# Altium PCB Testboard.PcbDoc (part 1 of 2)
Units mil, origin at the board's own origin, x right, y up, seen from the top; angles counter-clockwise.
Board outline 5500 x 5000 mil, 4 copper layers (Top layer, Inner Layer 1, Inner Layer 2, Bottom Layer), stack 13.956 mil thick; 71 components, 75 nets, 1162 pads, 400 vias.
Unrouted connection lines stored in the file: 423.
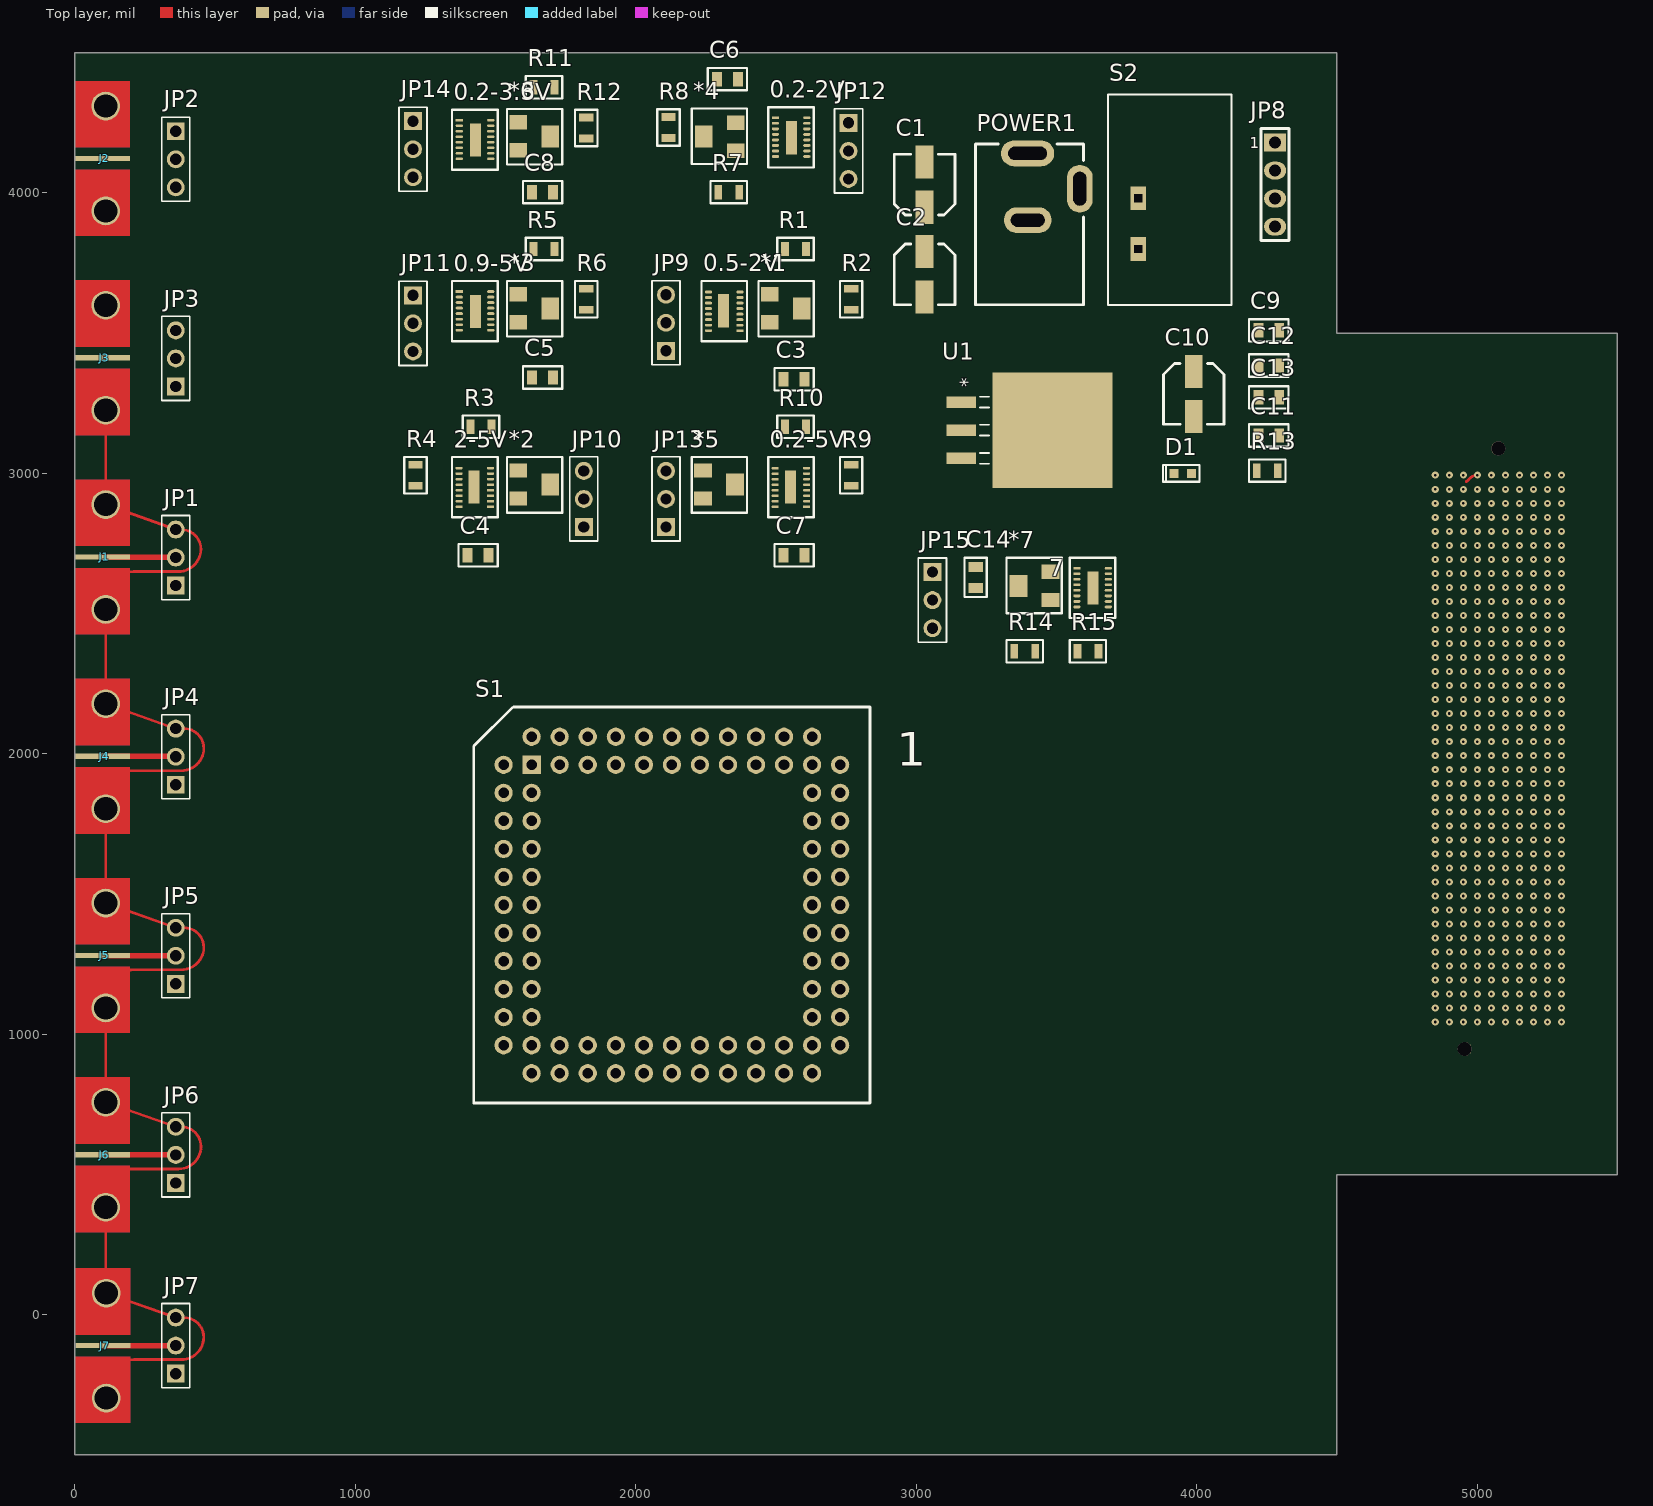
[diagram p0: Top layer view]
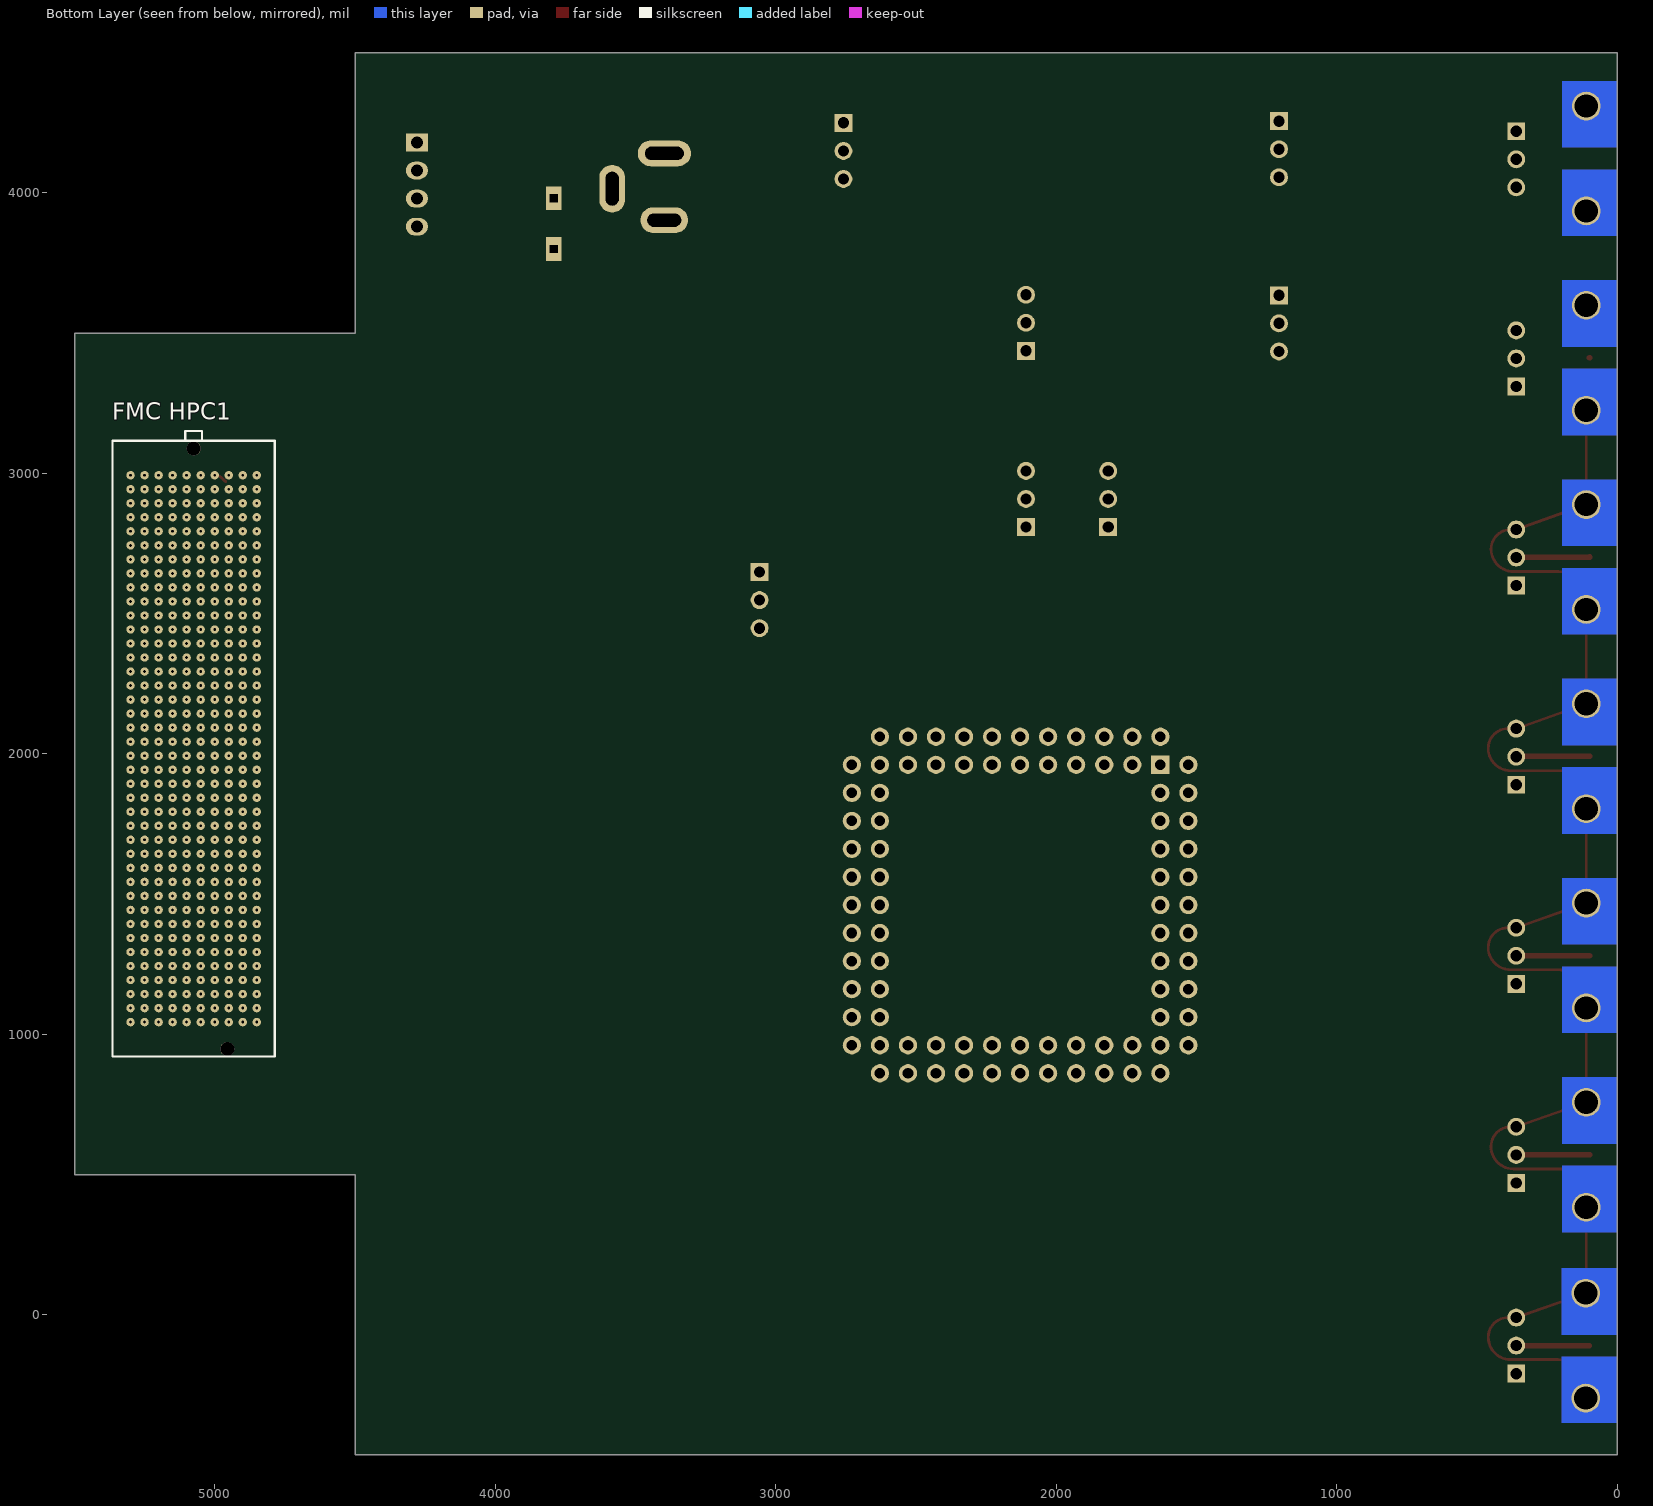
[diagram p1: Bottom Layer view, seen from below]

## Layer stack, top to bottom
Top Solder: solder mask 0.4, Solder Resist, Dk 3.5
Top layer: signal copper 1.378
Dielectric 2: prepreg 2.8, PP-006, Dk 4.1
Inner Layer 1: signal copper 1.4
Dielectric 1: dielectric 2.8, FR-4, Dk 4.8
Inner Layer 2: signal copper 1.4
Dielectric 3: prepreg 2.8, PP-006, Dk 4.1
Bottom Layer: signal copper 1.378
Bottom Solder: solder mask 0.4, Solder Resist, Dk 3.5

## Board outline
0,-500 4500,-500 4500,500 5500,500 5500,3500 4500,3500 4500,4500 0,4500 0,200 0,100

## Design rules (kind name [scope] priority, off if disabled: settings)
BoardOutlineClearance [All] p1: gap=10 ignorepadtopadclearanceinfootprint=FALSE
Clearance [All] p1: gap=6 ignorepadtopadclearanceinfootprint=TRUE
ComponentClearance [All] p1: gap=4 collisioncheckmode=3 verticalgap=4 showdistances=FALSE
HoleSize [All] p1: absolutevalues=TRUE maxlimit=250 minlimit=4 maxpercent=80.000 minpercent=20.000
HoleToHoleClearance [All] p1: gap=11 allowstackedmicrovias=TRUE
MatchedLengths [InNetClass('TIA')] p1: tolerance=10 checknetsindiffpair=FALSE checkdiffpairvsdiffpair=TRUE checkxsignals=TRUE checkothers=TRUE
MinimumAnnularRing [All] p1: minimumring=4
PlaneClearance [All] p1: clearance=10
PolygonConnect [All] p1: connectstyle=Relief reliefconductorwidth=10 reliefentries=4 polygonreliefangle="90 Angle" airgapwidth=10
RoutingVias [All] p1: holewidth=16 width=32 viastyle="Through Hole" minholewidth=4 minwidth=12 maxholewidth=16 maxwidth=32
SolderMaskExpansion [All] p1: expansion=3 istentingtop=FALSE
Width [All] p1: maxlimit=100 minlimit=3 preferedwidth=7
26 further rules are at their usual default settings.

## Classes and differential pairs
net class DAC: DAC_CLK_AZ_IN1 DAC_CLK_DAC_IN1 DAC_CLK_IN1 DAC_DATAIN_IN1 DAC_RST_IN1 DAC_SYNC_IN1 DAC_TBUFFER_IN1 DAC_TDAC_IN1
net class ADC: ADC_CLK ADC_CLK_SAMPLE ADC_DOUT1 ADC_DOUT2 ADC_DOUT3 ADC_DOUT4 ADC_DOUT5 ADC_DOUT6 ADC_DOUT7 ADC_DOUT8 ADC_DOUT9 ADC_DOUT10
component class VOUT_0.2V-3.3V: 7 *7 C14 JP15 R14 R15
net class TIA: TIA_CIN0 TIA_CIN1 TIA_CIN2 TIA_CIN3 TIA_CIN5 TIA_CIN6
component class 12V_to_5V: C9 C10 C11 C12 C13 D1 R13 U1

## Components (designator, comment, footprint, x,y, rotation, side; value= is the part's Value field where it differs from the comment)
0.2-2V "Part Number: LT3022EDHC#PBF-ND" LT3022 2497.99,4267.87 r0 top
0.2-3.3V "Part Number: LT3022EDHC#PBF-ND" LT3022 1370.95,4259.53 r0 top
0.2-5V "Part Number: LT3022EDHC#PBF-ND" LT3022 2609.29,2880.97 r180 top
0.5-2V "Part Number: LT3022EDHC#PBF-ND" LT3022 2371.53,3509 r180 top
0.9-5V "Part Number: LT3022EDHC#PBF-ND" LT3022 1370.95,3648.53 r0 top
2-5V "Part Number: LT3022EDHC#PBF-ND" LT3022 1482.25,2880.97 r180 top
7 "Part Number: LT3022EDHC#PBF-ND" LT3022 3573,2661.74 r0 top
*1 "Var_RES" res_var_5turn 2477.76,3638.41 r270 top
*2 "Var_RES" res_var_5turn 1581,3010.38 r270 top
*3 "Var_RES" res_var_5turn 1581,3638.41 r270 top
*4 "Var_RES" res_var_5turn 2356.93,4151 r90 top
*5 "Var_RES" res_var_5turn 2240,3010.38 r270 top
*6 "Var_RES" res_var_5turn 1581,4252 r270 top
*7 "Var_RES" res_var_5turn 3479.17,2548.87 r90 top
C1 "100u /10V" C_ALU_C_SIZE 3030,4029.71 r90 top
C2 "100u /10V" C_ALU_C_SIZE 3030,3710 r270 top
C3 "10uF" C0805 2527.44,3336 r0 top
C4 "10uF" C0805 1400.4,2708 r0 top
C5 "10uF" C0805 1705.49,3342 r180 top
C6 "10uF" C0805 2289.68,4406 r0 top
C7 "10uF" C0805 2527.44,2708 r0 top
C8 "10uF" C0805 1705.49,4003 r180 top
C9 "10uF RF" C0805 4220,3510 r0 top
C10 "100u /10V" C_ALU_C_SIZE 3990,3283.24 r270 top
C11 "10nF RF" C0805 4220,3135 r0 top
C12 "100nF RF" C0805 4220,3385 r0 top
C13 "10uF RF" C0805 4220,3271 r0 top
C14 "10uF" C0805 3212,2591.86 r90 top
D1 "Green" LED_0603 3919.17,3000 r0 top
"FMC HPC1" "FMC_HPC" FMC_HPC 4955.92,947.98 r90 bottom
J1 "SMA-32K243-40ML5" ROS-32K243-40ML5_V -0.24,2701.99 r90 top
J2 "SMA-32K243-40ML5" ROS-32K243-40ML5_V -0.24,4122.99 r90 top
J3 "SMA-32K243-40ML5" ROS-32K243-40ML5_V -0.24,3412.49 r90 top
J4 "SMA-32K243-40ML5" ROS-32K243-40ML5_V -0.24,1991.5 r90 top
J5 "SMA-32K243-40ML5" ROS-32K243-40ML5_V -0.24,1281 r90 top
J6 "SMA-32K243-40ML5" ROS-32K243-40ML5_V -0.24,570.5 r90 top
J7 "SMA-32K243-40ML5" ROS-32K243-40ML5_V 1.57,-110 r90 top
JP1 "Jumper" 01x03_0.1in_th_straight_b_nom 360,2700 r90 top
JP2 "Jumper" 01x03_0.1in_th_straight_b_nom 360,4120 r270 top
JP3 "Jumper" 01x03_0.1in_th_straight_b_nom 360,3410 r90 top
JP4 "Jumper" 01x03_0.1in_th_straight_b_nom 360,1990 r90 top
JP5 "Jumper" 01x03_0.1in_th_straight_b_nom 360,1280 r90 top
JP6 "Jumper" 01x03_0.1in_th_straight_b_nom 360,570 r90 top
JP7 "Jumper" 01x03_0.1in_th_straight_b_nom 360,-110 r90 top
JP8 "HDR 1x4" Hdr_1x4_2.54mm 4280,4180 r0 top
JP9 "Jumper" 01x03_0.1in_th_straight_b_nom 2108,3537.04 r90 top
JP10 "Jumper" 01x03_0.1in_th_straight_b_nom 1814.98,2909 r90 top
JP11 "Jumper" 01x03_0.1in_th_straight_b_nom 1206,3535 r270 top
JP12 "Jumper" 01x03_0.1in_th_straight_b_nom 2759,4150 r270 top
JP13 "Jumper" 01x03_0.1in_th_straight_b_nom 2108,2909 r90 top
JP14 "Jumper" 01x03_0.1in_th_straight_b_nom 1206,4156 r270 top
JP15 "Jumper" 01x03_0.1in_th_straight_b_nom 3058,2548.21 r270 top
POWER1 "PWR-2.1MM" POWER2.1MM 3397.45,4141.24 r270 top
R1 "100" R0805 2607.24,3800 r180 top
R2 "100" R0805 2768.02,3583.65 r90 top
R3 "100" R0805 1411,3166 r0 top
R4 "100" R0805 1215.02,2955.61 r90 top
R5 "100" R0805 1710.49,3800 r180 top
R6 "100" R0805 1824,3583.65 r90 top
R7 "100" R0805 2294.68,4003 r0 top
R8 "100" R0805 2117.02,4271 r270 top
R9 "100" R0805 2768.02,3030.42 r270 top
R10 "100" R0805 2532.44,3166 r0 top
R11 "100" R0805 1710.49,4377 r180 top
R12 "100" R0805 1824,4194.2 r90 top
R13 "2k" R0805 4289.8,3010 r180 top
R14 "100" R0805 3349.69,2366 r0 top
R15 "100" R0805 3649.85,2366 r180 top
S1 "CONN SOCKET PLCC 20POS TIN" SERIES940_Socket 1629,1961 r0 top
S2 "SW-SPST" SPST-2 3792,3981.17 r270 top
U1 "Part Number: LM1085IS-5.0/NOPB" LM1085 3487,3154 r270 top value=Value

## Footprints (in the part's own frame and the unit in brackets; to place one, negate y for a bottom-side part, rotate by r counter-clockwise, add the part's x,y. Pads: shape width x height; smd on the part's side, far side on the other; paste and mask are expansions set on the pad)
01x03_0.1in_th_straight_b_nom [mm] "3 positions (1 row, 3 columns), 0.1 Inch pitch, through hole straight header (B Density)"
  rect 1.62x1.62 hole 1.02: 1(-2.54,0)
  round 1.62 hole 1.02: 2(0,0) 3(2.54,0)
  silkscreen extent -3.81,-1.27 3.81,1.27, body extent -3.94,-1.27 3.81,1.27, height 8.38
C0805 [mm]
  rect 0.9x1.3 smd: 1(0,0) 2(1.9,0)
  silkscreen extent -0.83,-1.02 2.73,1.02, body extent -0.05,-0.6 1.95,0.6, height 1.46
C_ALU_C_SIZE [mm]
  rect 3x1.6 smd: 1(-2.05,0) 2(2.05,0)
  silkscreen extent -2.75,-2.75 2.75,2.75, body extent -2.95,-2.65 2.95,2.65, height 5.41
FMC_HPC [mm]
  round 0.762 smd paste-25.4 mask+0.013: A1(51.956,8.765) A2(50.686,8.765) A3(49.416,8.765) A4(48.146,8.765) A5(46.876,8.765) A6(45.606,8.765) A7(44.336,8.765) A8(43.066,8.765) A9(41.796,8.765) A10(40.526,8.765) A11(39.256,8.765) A12(37.986,8.765) A13(36.716,8.765) A14(35.446,8.765) A15(34.176,8.765) A16(32.906,8.765) A17(31.636,8.765) A18(30.366,8.765) A19(29.096,8.765) A20(27.826,8.765) A21(26.556,8.765) A22(25.286,8.765) A23(24.016,8.765) A24(22.746,8.765) A25(21.476,8.765) A26(20.206,8.765) A27(18.936,8.765) A28(17.666,8.765) A29(16.396,8.765) A30(15.126,8.765) A31(13.856,8.765) A32(12.586,8.765) A33(11.316,8.765) A34(10.046,8.765) A35(8.776,8.765) A36(7.506,8.765) A37(6.236,8.765) A38(4.966,8.765) A39(3.696,8.765) A40(2.426,8.765) B1(51.956,7.495) B2(50.686,7.495) B3(49.416,7.495) B4(48.146,7.495) B5(46.876,7.495) B6(45.606,7.495) B7(44.336,7.495) B8(43.066,7.495) B9(41.796,7.495) B10(40.526,7.495) B11(39.256,7.495) B12(37.986,7.495) B13(36.716,7.495) B14(35.446,7.495) B15(34.176,7.495) B16(32.906,7.495) B17(31.636,7.495) B18(30.366,7.495) B19(29.096,7.495) B20(27.826,7.495) B21(26.556,7.495) B22(25.286,7.495) B23(24.016,7.495) B24(22.746,7.495) B25(21.476,7.495) B26(20.206,7.495) B27(18.936,7.495) B28(17.666,7.495) B29(16.396,7.495) B30(15.126,7.495) B31(13.856,7.495) B32(12.586,7.495) B33(11.316,7.495) B34(10.046,7.495) B35(8.776,7.495) B36(7.506,7.495) B37(6.236,7.495) B38(4.966,7.495) B39(3.696,7.495) B40(2.426,7.495) C1(51.956,6.225) C2(50.686,6.225) C3(49.416,6.225) C4(48.146,6.225) C5(46.876,6.225) C6(45.606,6.225) C7(44.336,6.225) C8(43.066,6.225) C9(41.796,6.225) C10(40.526,6.225) C11(39.256,6.225) C12(37.986,6.225) C13(36.716,6.225) C14(35.446,6.225) C15(34.176,6.225) C16(32.906,6.225) C17(31.636,6.225) C18(30.366,6.225) C19(29.096,6.225) C20(27.826,6.225) C21(26.556,6.225) C22(25.286,6.225) C23(24.016,6.225) C24(22.746,6.225) C25(21.476,6.225) C26(20.206,6.225) C27(18.936,6.225) C28(17.666,6.225) C29(16.396,6.225) C30(15.126,6.225) C31(13.856,6.225) C32(12.586,6.225) C33(11.316,6.225) C34(10.046,6.225) C35(8.776,6.225) C36(7.506,6.225) C37(6.236,6.225) C38(4.966,6.225) C39(3.696,6.225) C40(2.426,6.225) D1(51.956,4.955) D2(50.686,4.955) D3(49.416,4.955) D4(48.146,4.955) D5(46.876,4.955) D6(45.606,4.955) D7(44.336,4.955) D8(43.066,4.955) D9(41.796,4.955) D10(40.526,4.955) D11(39.256,4.955) D12(37.986,4.955) D13(36.716,4.955) D14(35.446,4.955) D15(34.176,4.955) D16(32.906,4.955) D17(31.636,4.955) D18(30.366,4.955) D19(29.096,4.955) D20(27.826,4.955) D21(26.556,4.955) D22(25.286,4.955) D23(24.016,4.955) D24(22.746,4.955) D25(21.476,4.955) D26(20.206,4.955) D27(18.936,4.955) D28(17.666,4.955) D29(16.396,4.955) D30(15.126,4.955) D31(13.856,4.955) D32(12.586,4.955) D33(11.316,4.955) D34(10.046,4.955) D35(8.776,4.955) D36(7.506,4.955) D37(6.236,4.955) D38(4.966,4.955) D39(3.696,4.955) D40(2.426,4.955) E1(51.956,3.685) E2(50.686,3.685) E3(49.416,3.685) E4(48.146,3.685) E5(46.876,3.685) E6(45.606,3.685) E7(44.336,3.685) E8(43.066,3.685) E9(41.796,3.685) E10(40.526,3.685) E11(39.256,3.685) E12(37.986,3.685) E13(36.716,3.685) E14(35.446,3.685) E15(34.176,3.685) E16(32.906,3.685) E17(31.636,3.685) E18(30.366,3.685) E19(29.096,3.685) E20(27.826,3.685) E21(26.556,3.685) E22(25.286,3.685) E23(24.016,3.685) E24(22.746,3.685) E25(21.476,3.685) E26(20.206,3.685) E27(18.936,3.685) E28(17.666,3.685) E29(16.396,3.685) E30(15.126,3.685) E31(13.856,3.685) E32(12.586,3.685) E33(11.316,3.685) E34(10.046,3.685) E35(8.776,3.685) E36(7.506,3.685) E37(6.236,3.685) E38(4.966,3.685) E39(3.696,3.685) E40(2.426,3.685) F1(51.956,2.415) F2(50.686,2.415) F3(49.416,2.415) F4(48.146,2.415) F5(46.876,2.415) F6(45.606,2.415) F7(44.336,2.415) F8(43.066,2.415) F9(41.796,2.415) F10(40.526,2.415) F11(39.256,2.415) F12(37.986,2.415) F13(36.716,2.415) F14(35.446,2.415) F15(34.176,2.415) F16(32.906,2.415) F17(31.636,2.415) F18(30.366,2.415) F19(29.096,2.415) F20(27.826,2.415) F21(26.556,2.415) F22(25.286,2.415) F23(24.016,2.415) F24(22.746,2.415) F25(21.476,2.415) F26(20.206,2.415) F27(18.936,2.415) F28(17.666,2.415) F29(16.396,2.415) F30(15.126,2.415) F31(13.856,2.415) F32(12.586,2.415) F33(11.316,2.415) F34(10.046,2.415) F35(8.776,2.415) F36(7.506,2.415) F37(6.236,2.415) F38(4.966,2.415) F39(3.696,2.415) F40(2.426,2.415) G1(51.956,1.145) G2(50.686,1.145) G3(49.416,1.145) G4(48.146,1.145) G5(46.876,1.145) G6(45.606,1.145) G7(44.336,1.145) G8(43.066,1.145) G9(41.796,1.145) G10(40.526,1.145) G11(39.256,1.145) G12(37.986,1.145) G13(36.716,1.145) G14(35.446,1.145) G15(34.176,1.145) G16(32.906,1.145) G17(31.636,1.145) G18(30.366,1.145) G19(29.096,1.145) G20(27.826,1.145) G21(26.556,1.145) G22(25.286,1.145) G23(24.016,1.145) G24(22.746,1.145) G25(21.476,1.145) G26(20.206,1.145) G27(18.936,1.145) G28(17.666,1.145) G29(16.396,1.145) G30(15.126,1.145) G31(13.856,1.145) G32(12.586,1.145) G33(11.316,1.145) G34(10.046,1.145) G35(8.776,1.145) G36(7.506,1.145) G37(6.236,1.145) G38(4.966,1.145) G39(3.696,1.145) G40(2.426,1.145) H1(51.956,-0.125) H2(50.686,-0.125) H3(49.416,-0.125) H4(48.146,-0.125) H5(46.876,-0.125) H6(45.606,-0.125) H7(44.336,-0.125) H8(43.066,-0.125) H9(41.796,-0.125) H10(40.526,-0.125) H11(39.256,-0.125) H12(37.986,-0.125) H13(36.716,-0.125) H14(35.446,-0.125) H15(34.176,-0.125) H16(32.906,-0.125) H17(31.636,-0.125) H18(30.366,-0.125) H19(29.096,-0.125) H20(27.826,-0.125) H21(26.556,-0.125) H22(25.286,-0.125) H23(24.016,-0.125) H24(22.746,-0.125) H25(21.476,-0.125) H26(20.206,-0.125) H27(18.936,-0.125) H28(17.666,-0.125) H29(16.396,-0.125) H30(15.126,-0.125) H31(13.856,-0.125) H32(12.586,-0.125) H33(11.316,-0.125) H34(10.046,-0.125) H35(8.776,-0.125) H36(7.506,-0.125) H37(6.236,-0.125) H38(4.966,-0.125) H39(3.696,-0.125) H40(2.426,-0.125) J1(51.956,-1.395) J2(50.686,-1.395) J3(49.416,-1.395) J4(48.146,-1.395) J5(46.876,-1.395) J6(45.606,-1.395) J7(44.336,-1.395) J8(43.066,-1.395) J9(41.796,-1.395) J10(40.526,-1.395) J11(39.256,-1.395) J12(37.986,-1.395) J13(36.716,-1.395) J14(35.446,-1.395) J15(34.176,-1.395) J16(32.906,-1.395) J17(31.636,-1.395) J18(30.366,-1.395) J19(29.096,-1.395) J20(27.826,-1.395) J21(26.556,-1.395) J22(25.286,-1.395) J23(24.016,-1.395) J24(22.746,-1.395) J25(21.476,-1.395) J26(20.206,-1.395) J27(18.936,-1.395) J28(17.666,-1.395) J29(16.396,-1.395) J30(15.126,-1.395) J31(13.856,-1.395) J32(12.586,-1.395) J33(11.316,-1.395) J34(10.046,-1.395) J35(8.776,-1.395) J36(7.506,-1.395) J37(6.236,-1.395) J38(4.966,-1.395) J39(3.696,-1.395) J40(2.426,-1.395) K1(51.956,-2.665) K2(50.686,-2.665) K3(49.416,-2.665) K4(48.146,-2.665) K5(46.876,-2.665) K6(45.606,-2.665) K7(44.336,-2.665) K8(43.066,-2.665) K9(41.796,-2.665) K10(40.526,-2.665) K11(39.256,-2.665) K12(37.986,-2.665) K13(36.716,-2.665) K14(35.446,-2.665) K15(34.176,-2.665) K16(32.906,-2.665) K17(31.636,-2.665) K18(30.366,-2.665) K19(29.096,-2.665) K20(27.826,-2.665) K21(26.556,-2.665) K22(25.286,-2.665) K23(24.016,-2.665) K24(22.746,-2.665) K25(21.476,-2.665) K26(20.206,-2.665) K27(18.936,-2.665) K28(17.666,-2.665) K29(16.396,-2.665) K30(15.126,-2.665) K31(13.856,-2.665) K32(12.586,-2.665) K33(11.316,-2.665) K34(10.046,-2.665) K35(8.776,-2.665) K36(7.506,-2.665) K37(6.236,-2.665) K38(4.966,-2.665) K39(3.696,-2.665) K40(2.426,-2.665)
  round 1.27 hole 1.27 unplated: ""(0,0) ""(54.382,3.05)
  round 0.635 on Top Solder paste-25.4 mask+0.003: ""(2.426,-2.665) ""(2.426,-1.395) ""(2.426,-0.125) ""(2.426,1.145) ""(2.426,2.415) ""(2.426,3.685) ""(2.426,4.955) ""(2.426,6.225) ""(2.426,7.495) ""(2.426,8.765) ""(3.696,-2.665) ""(3.696,-1.395) ""(3.696,-0.125) ""(3.696,1.145) ""(3.696,2.415) ""(3.696,3.685) ""(3.696,4.955) ""(3.696,6.225) ""(3.696,7.495) ""(3.696,8.765) ""(4.966,-2.665) ""(4.966,-1.395) ""(4.966,-0.125) ""(4.966,1.145) ""(4.966,2.415) ""(4.966,3.685) ""(4.966,4.955) ""(4.966,6.225) ""(4.966,7.495) ""(4.966,8.765) ""(6.236,-2.665) ""(6.236,-1.395) ""(6.236,-0.125) ""(6.236,1.145) ""(6.236,2.415) ""(6.236,3.685) ""(6.236,4.955) ""(6.236,6.225) ""(6.236,7.495) ""(6.236,8.765) ""(7.506,-2.665) ""(7.506,-1.395) ""(7.506,-0.125) ""(7.506,1.145) ""(7.506,2.415) ""(7.506,3.685) ""(7.506,4.955) ""(7.506,6.225) ""(7.506,7.495) ""(7.506,8.765) ""(8.776,-2.665) ""(8.776,-1.395) ""(8.776,-0.125) ""(8.776,1.145) ""(8.776,2.415) ""(8.776,3.685) ""(8.776,4.955) ""(8.776,6.225) ""(8.776,7.495) ""(8.776,8.765) ""(10.046,-2.665) ""(10.046,-1.395) ""(10.046,-0.125) ""(10.046,1.145) ""(10.046,2.415) ""(10.046,3.685) ""(10.046,4.955) ""(10.046,6.225) ""(10.046,7.495) ""(10.046,8.765) ""(11.316,-2.665) ""(11.316,-1.395) ""(11.316,-0.125) ""(11.316,1.145) ""(11.316,2.415) ""(11.316,3.685) ""(11.316,4.955) ""(11.316,6.225) ""(11.316,7.495) ""(11.316,8.765) ""(12.586,-2.665) ""(12.586,-1.395) ""(12.586,-0.125) ""(12.586,1.145) ""(12.586,2.415) ""(12.586,3.685) ""(12.586,4.955) ""(12.586,6.225) ""(12.586,7.495) ""(12.586,8.765) ""(13.856,-2.665) ""(13.856,-1.395) ""(13.856,-0.125) ""(13.856,1.145) ""(13.856,2.415) ""(13.856,3.685) ""(13.856,4.955) ""(13.856,6.225) ""(13.856,7.495) ""(13.856,8.765) ""(15.126,-2.665) ""(15.126,-1.395) ""(15.126,-0.125) ""(15.126,1.145) ""(15.126,2.415) ""(15.126,3.685) ""(15.126,4.955) ""(15.126,6.225) ""(15.126,7.495) ""(15.126,8.765) ""(16.396,-2.665) ""(16.396,-1.395) ""(16.396,-0.125) ""(16.396,1.145) ""(16.396,2.415) ""(16.396,3.685) ""(16.396,4.955) ""(16.396,6.225) ""(16.396,7.495) ""(16.396,8.765) ""(17.666,-2.665) ""(17.666,-1.395) ""(17.666,-0.125) ""(17.666,1.145) ""(17.666,2.415) ""(17.666,3.685) ""(17.666,4.955) ""(17.666,6.225) ""(17.666,7.495) ""(17.666,8.765) ""(18.936,-2.665) ""(18.936,-1.395) ""(18.936,-0.125) ""(18.936,1.145) ""(18.936,2.415) ""(18.936,3.685) ""(18.936,4.955) ""(18.936,6.225) ""(18.936,7.495) ""(18.936,8.765) ""(20.206,-2.665) ""(20.206,-1.395) ""(20.206,-0.125) ""(20.206,1.145) ""(20.206,2.415) ""(20.206,3.685) ""(20.206,4.955) ""(20.206,6.225) ""(20.206,7.495) ""(20.206,8.765) ""(21.476,-2.665) ""(21.476,-1.395) ""(21.476,-0.125) ""(21.476,1.145) ""(21.476,2.415) ""(21.476,3.685) ""(21.476,4.955) ""(21.476,6.225) ""(21.476,7.495) ""(21.476,8.765) ""(22.746,-2.665) ""(22.746,-1.395) ""(22.746,-0.125) ""(22.746,1.145) ""(22.746,2.415) ""(22.746,3.685) ""(22.746,4.955) ""(22.746,6.225) ""(22.746,7.495) ""(22.746,8.765) ""(24.016,-2.665) ""(24.016,-1.395) ""(24.016,-0.125) ""(24.016,1.145) ""(24.016,2.415) ""(24.016,3.685) ""(24.016,4.955) ""(24.016,6.225) ""(24.016,7.495) ""(24.016,8.765) ""(25.286,-2.665) ""(25.286,-1.395) ""(25.286,-0.125) ""(25.286,1.145) ""(25.286,2.415) ""(25.286,3.685) ""(25.286,4.955) ""(25.286,6.225) ""(25.286,7.495) ""(25.286,8.765) ""(26.556,-2.665) ""(26.556,-1.395) ""(26.556,-0.125) ""(26.556,1.145) ""(26.556,2.415) ""(26.556,3.685) ""(26.556,4.955) ""(26.556,6.225) ""(26.556,7.495) ""(26.556,8.765) ""(27.826,-2.665) ""(27.826,-1.395) ""(27.826,-0.125) ""(27.826,1.145) ""(27.826,2.415) ""(27.826,3.685) ""(27.826,4.955) ""(27.826,6.225) ""(27.826,7.495) ""(27.826,8.765) ""(29.096,-2.665) ""(29.096,-1.395) ""(29.096,-0.125) ""(29.096,1.145) ""(29.096,2.415) ""(29.096,3.685) ""(29.096,4.955) ""(29.096,6.225) ""(29.096,7.495) ""(29.096,8.765) ""(30.366,-2.665) ""(30.366,-1.395) ""(30.366,-0.125) ""(30.366,1.145) ""(30.366,2.415) ""(30.366,3.685) ""(30.366,4.955) ""(30.366,6.225) ""(30.366,7.495) ""(30.366,8.765) ""(31.636,-2.665) ""(31.636,-1.395) ""(31.636,-0.125) ""(31.636,1.145) ""(31.636,2.415) ""(31.636,3.685) ""(31.636,4.955) ""(31.636,6.225) ""(31.636,7.495) ""(31.636,8.765) ""(32.906,-2.665) ""(32.906,-1.395) ""(32.906,-0.125) ""(32.906,1.145) ""(32.906,2.415) ""(32.906,3.685) ""(32.906,4.955) ""(32.906,6.225) ""(32.906,7.495) ""(32.906,8.765) ""(34.176,-2.665) ""(34.176,-1.395) ""(34.176,-0.125) ""(34.176,1.145) ""(34.176,2.415) ""(34.176,3.685) ""(34.176,4.955) ""(34.176,6.225) ""(34.176,7.495) ""(34.176,8.765) ""(35.446,-2.665) ""(35.446,-1.395) ""(35.446,-0.125) ""(35.446,1.145) ""(35.446,2.415) ""(35.446,3.685) ""(35.446,4.955) ""(35.446,6.225) ""(35.446,7.495) ""(35.446,8.765) ""(36.716,-2.665) ""(36.716,-1.395) ""(36.716,-0.125) ""(36.716,1.145) ""(36.716,2.415) ""(36.716,3.685) ""(36.716,4.955) ""(36.716,6.225) ""(36.716,7.495) ""(36.716,8.765) ""(37.986,-2.665) ""(37.986,-1.395) ""(37.986,-0.125) ""(37.986,1.145) ""(37.986,2.415) ""(37.986,3.685) ""(37.986,4.955) ""(37.986,6.225) ""(37.986,7.495) ""(37.986,8.765) ""(39.256,-2.665) ""(39.256,-1.395) ""(39.256,-0.125) ""(39.256,1.145) ""(39.256,2.415) ""(39.256,3.685) ""(39.256,4.955) ""(39.256,6.225) ""(39.256,7.495) ""(39.256,8.765) ""(40.526,-2.665) ""(40.526,-1.395) ""(40.526,-0.125) ""(40.526,1.145) ""(40.526,2.415) ""(40.526,3.685) ""(40.526,4.955) ""(40.526,6.225) ""(40.526,7.495) ""(40.526,8.765) ""(41.796,-2.665) ""(41.796,-1.395) ""(41.796,-0.125) ""(41.796,1.145) ""(41.796,2.415) ""(41.796,3.685) ""(41.796,4.955) ""(41.796,6.225) ""(41.796,7.495) ""(41.796,8.765) ""(43.066,-2.665) ""(43.066,-1.395) ""(43.066,-0.125) ""(43.066,1.145) ""(43.066,2.415) ""(43.066,3.685) ""(43.066,4.955) ""(43.066,6.225) ""(43.066,7.495) ""(43.066,8.765) ""(44.336,-2.665) ""(44.336,-1.395) ""(44.336,-0.125) ""(44.336,1.145) ""(44.336,2.415) ""(44.336,3.685) ""(44.336,4.955) ""(44.336,6.225) ""(44.336,7.495) ""(44.336,8.765) ""(45.606,-2.665) ""(45.606,-1.395) ""(45.606,-0.125) ""(45.606,1.145) ""(45.606,2.415) ""(45.606,3.685) ""(45.606,4.955) ""(45.606,6.225) ""(45.606,7.495) ""(45.606,8.765) ""(46.876,-2.665) ""(46.876,-1.395) ""(46.876,-0.125) ""(46.876,1.145) ""(46.876,2.415) ""(46.876,3.685) ""(46.876,4.955) ""(46.876,6.225) ""(46.876,7.495) ""(46.876,8.765) ""(48.146,-2.665) ""(48.146,-1.395) ""(48.146,-0.125) ""(48.146,1.145) ""(48.146,2.415) ""(48.146,3.685) ""(48.146,4.955) ""(48.146,6.225) ""(48.146,7.495) ""(48.146,8.765) ""(49.416,-2.665) ""(49.416,-1.395) ""(49.416,-0.125) ""(49.416,1.145) ""(49.416,2.415) ""(49.416,3.685) ""(49.416,4.955) ""(49.416,6.225) ""(49.416,7.495) ""(49.416,8.765) ""(50.686,-2.665) ""(50.686,-1.395) ""(50.686,-0.125) ""(50.686,1.145) ""(50.686,2.415) ""(50.686,3.685) ""(50.686,4.955) ""(50.686,6.225) ""(50.686,7.495) ""(50.686,8.765) ""(51.956,-2.665) ""(51.956,-1.395) ""(51.956,-0.125) ""(51.956,1.145) ""(51.956,2.415) ""(51.956,3.685) ""(51.956,4.955) ""(51.956,6.225) ""(51.956,7.495) ""(51.956,8.765)
  silkscreen extent -0.7,-4.29 55.97,10.39, body extent -0.76,-4.19 56.01,10.41, height 1.55
Hdr_1x4_2.54mm [mm]
  rect 2x1.6 hole 1.1: 1(0,0)
  oval 2x1.6 hole 1.1: 2(0,-2.54) 3(0,-5.08) 4(0,-7.62)
  silkscreen extent -1.27,-8.89 1.27,1.27, body extent -1.21,-8.89 1.21,1.27, height 8.39
LED_0603 [mm]
  rect 0.8x0.8 smd: 1(0,0) 2(1.6,0)
  silkscreen extent -0.98,-0.76 2.32,0.76, body extent -0.05,-0.4 1.65,0.4, height 0.7
LM1085 [mil]
  rect 40x106 smd paste+0 mask+0: 1(-100,-326) 2(0,-326) 3(100,-326)
  rect 412x428 smd paste+0 mask+0: 4(0,0)
  silkscreen extent -119,-259 119,-227, body extent -205,-278 205,200, height 189
LT3022 [mm]
  rect 0.65x0.25 smd: 1(0,0)
  oval 0.65x0.25 smd: 2(0,-0.5) 3(0,-1) 4(0,-1.5) 5(0,-2) 6(0,-2.5) 7(0,-3) 8(0,-3.5) 9(2.85,-3.5) 10(2.85,-3) 11(2.85,-2.5) 12(2.85,-2) 13(2.85,-1.5) 14(2.85,-1) 15(2.85,-0.5) 16(2.85,0)
  rect 1x3 smd: 7(1.475,-1.8)
  silkscreen extent -0.65,-4.5 3.48,0.95, body extent -0.12,-4.3 2.98,0.8, height 0.8
POWER2.1MM [mil]
  oval 92x190 hole 47 slot 138 at 90 deg: 1(0,0)
  oval 170x92 hole 47 slot 120 at 0 deg: 2(126,186.17)
  oval 92x170 hole 47 slot 120 at 90 deg: 3(238.19,0.55)
  silkscreen extent -33,-186 540,200, body extent -25,-178 542,192, height 434
R0805 [mm]
  rect 0.7x1.3 smd: 1(0,0) 2(1.9,0)
  silkscreen extent -0.7,-1.02 2.6,1.02, body extent -0.05,-0.6 1.95,0.6, height 0.71
res_var_5turn [mm]
  rect 1.3x1.6 smd: 1(0,0) 3(2.54,0)
  rect 2x1.6 smd: 2(1.27,2.9)
  silkscreen extent -1.21,-1.02 3.82,3.99, body extent -1.1,-0.52 3.7,3.38, height 5.31
ROS-32K243-40ML5_V [mm] "SMA Jack, Right Angle, Edge Mount Screw On, 14.50x14.00x5.15mm, Rosenberger Recommended"
  rect 0.48x5 smd: 1(0,-2.5)
  round 2.6 hole 2.1: MH(-4.75,-2.8) MH(4.75,-2.8)
  Top layer region: 1,0 4.75,0 4.75,-1.75 4.888,-1.75 5.155,-1.822 5.395,-1.96 5.59,-2.155 5.728,-2.395 5.8,-2.662 5.8,-2.938 5.728,-3.205 5.59,-3.445 5.395,-3.64 5.155,-3.778 4.888,-3.85 4.75,-3.85 4.612,-3.85 4.345,-3.778 4.105,-3.64 3.91,-3.445 3.772,-3.205 3.7,-2.938 3.7,-2.662 3.772,-2.395 3.91,-2.155 4.105,-1.96 4.345,-1.822 4.612,-1.75 4.75,-1.75 4.75,-1.75 4.75,0 7,0 7,-5 1,-5
  Top layer region: -1,0 -4.75,0 -4.75,-1.75 -4.888,-1.75 -5.155,-1.822 -5.395,-1.96 -5.59,-2.155 -5.728,-2.395 -5.8,-2.662 -5.8,-2.938 -5.728,-3.205 -5.59,-3.445 -5.395,-3.64 -5.155,-3.778 -4.888,-3.85 -4.75,-3.85 -4.612,-3.85 -4.345,-3.778 -4.105,-3.64 -3.91,-3.445 -3.772,-3.205 -3.7,-2.938 -3.7,-2.662 -3.772,-2.395 -3.91,-2.155 -4.105,-1.96 -4.345,-1.822 -4.612,-1.75 -4.75,-1.75 -4.75,-1.75 -4.75,0 -7,0 -7,-5 -1,-5
  Bottom Layer region: -1,0 -4.75,0 -4.75,-1.75 -4.888,-1.75 -5.155,-1.822 -5.395,-1.96 -5.59,-2.155 -5.728,-2.395 -5.8,-2.662 -5.8,-2.938 -5.728,-3.205 -5.59,-3.445 -5.395,-3.64 -5.155,-3.778 -4.888,-3.85 -4.75,-3.85 -4.612,-3.85 -4.345,-3.778 -4.105,-3.64 -3.91,-3.445 -3.772,-3.205 -3.7,-2.938 -3.7,-2.662 -3.772,-2.395 -3.91,-2.155 -4.105,-1.96 -4.345,-1.822 -4.612,-1.75 -4.75,-1.75 -4.75,-1.75 -4.75,0 -7,0 -7,-5 -1,-5
  Bottom Layer region: 1,0 4.75,0 4.75,-1.75 4.888,-1.75 5.155,-1.822 5.395,-1.96 5.59,-2.155 5.728,-2.395 5.8,-2.662 5.8,-2.938 5.728,-3.205 5.59,-3.445 5.395,-3.64 5.155,-3.778 4.888,-3.85 4.75,-3.85 4.612,-3.85 4.345,-3.778 4.105,-3.64 3.91,-3.445 3.772,-3.205 3.7,-2.938 3.7,-2.662 3.772,-2.395 3.91,-2.155 4.105,-1.96 4.345,-1.822 4.612,-1.75 4.75,-1.75 4.75,-1.75 4.75,0 7,0 7,-5 1,-5
  body extent -7,-5 7,9.5, height 5.15
SERIES940_Socket [mil]
  round 65 hole 38: 1(500,-1100) 2(500,-1000) 3(600,-1100) 4(600,-1000) 5(700,-1100) 6(700,-1000) 7(800,-1100) 8(800,-1000) 9(900,-1100) 10(900,-1000) 11(1000,-1100) 12(1100,-1000) 13(1000,-1000) 14(1100,-900) 15(1000,-900) 16(1100,-800) 17(1000,-800) 18(1100,-700) 19(1000,-700) 20(1100,-600) 21(1000,-600) 22(1100,-500) 23(1000,-500) 24(1100,-400) 25(1000,-400) 26(1100,-300) 27(1000,-300) 28(1100,-200) 29(1000,-200) 30(1100,-100) 31(1000,-100) 32(1100,0) 33(1000,100) 34(1000,0) 35(900,100) 36(900,0) 37(800,100) 38(800,0) 39(700,100) 40(700,0) 41(600,100) 42(600,0) 43(500,100) 44(500,0) 45(400,100) 46(400,0) 47(300,100) 48(300,0) 49(200,100) 50(200,0) 51(100,100) 52(100,0) 53(0,100) 54(-100,0) 56(-100,-100) 57(0,-100) 58(-100,-200) 59(0,-200) 60(-100,-300) 61(0,-300) 62(-100,-400) 63(0,-400) 64(-100,-500) 65(0,-500) 66(-100,-600) 67(0,-600) 68(-100,-700) 69(0,-700) 70(-100,-800) 71(0,-800) 72(-100,-900) 73(0,-900) 74(-100,-1000) 75(0,-1100) 76(0,-1000) 77(100,-1100) 78(100,-1000) 79(200,-1100) 80(200,-1000) 81(300,-1100) 82(300,-1000) 83(400,-1100) 84(400,-1000)
  rect 65x65 hole 38: 55(0,0)
  silkscreen extent -206,-1206 1206,206, body extent -206,-1206 1206,206, height 319
SPST-2 [mil] "Switch; 2 Leads"
  rect 85x55 hole 27 square: 1(0,0) 2(181,0)
  silkscreen extent -370,-108 381,332, body extent -377,-102 376,327, height 554

## Part data
0.2-2V 0.2-3.3V 0.2-5V 0.5-2V 0.9-5V 2-5V 7: library part LT3022, "Linear Voltage Regulator IC Positive Adjustable 1 Output 1A 16-DFN (5x3)"
C1 C2 C10: library part CAP-10uF, "CAP ALUM 100UF 20% 10V SMD", ESR (Equivalent Series Resistance)=-, Lifetime @ Temp.="1000 Hrs @ 85°C", Manufacturer="Panasonic Electronic Components", Manufacturer Part Number=EEE-1AA101WR, Operating Temperature="-40°C ~ 85°C", Package / Case="Radial, Can - SMD", Ratings=AEC-Q200, Supplier Part Number 1=PCE3867CT-ND, Tolerance=±20%, Applications=Automotive, Category=Capacitors, ComponentLink1Description=https://industrial.panasonic.com/cdbs/www-data/pdf/RDE0000/ABA0000C1145.pdf, ComponentLink1URL=https://industrial.panasonic.com/cdbs/www-data/pdf/RDE0000/ABA0000C1145.pdf, Height - Seated (Max)="0.213\" (5.40mm)", Lead Spacing=-, Mounting Type="Surface Mount", Packaging="Cut Tape (CT)", Part Status=Active, Polarization=Polar, Pricing 1="1=0.31, 10=0.212, 100=0.1272, 500=0.09538 (USD)", RoHS="RoHS Compliant", Size / Dimension="0.197\" Dia (5.00mm)", Stock 1=89696, Supplier 1=Digi-Key, Surface Mount Land Size="0.209\" L x 0.209\" W (5.30mm x 5.30mm)"
C3 C4 C5 C6 C7 C8 C14: library part "Cap 10uF", "Cap 10uF", Capacitance=10nF, Case Code (Imperial)=0805, Case Code (Metric)=2012, Dielectric Material=Ceramic, Manufacturer="Taiyo Yuden", Manufacturer Part Number=UMK212SD103KD-T, Max Operating Temperature=125°C, Min Operating Temperature=-55°C, Package Quantity=1, Supplier Part Number 1=587-1114-1-ND, Tolerance=10%, Voltage Rating=50V, Case/Package=0805, ComponentLink1Description=https://datasheet.ciiva.com/138/umk212sd103kd-t-ss-138661.pdf, ComponentLink1URL=https://datasheet.ciiva.com/138/umk212sd103kd-t-ss-138661.pdf, ComponentLink2Description=https://datasheet.ciiva.com/138/mlcc07-e-138662.pdf, ComponentLink2URL=https://datasheet.ciiva.com/138/mlcc07-e-138662.pdf, ComponentLink3Description=https://datasheet.ciiva.com/138/mlcc07-e-138663.pdf, ComponentLink3URL=https://datasheet.ciiva.com/138/mlcc07-e-138663.pdf, ComponentLink4Description=https://datasheet.ciiva.com/30140/303umk212sd103kd-t-30140925.pdf, ComponentLink4URL=https://datasheet.ciiva.com/30140/303umk212sd103kd-t-30140925.pdf, Depth=1.25mm, Halogen Free="Halogen Free", Height=0.85mm, Lead Free="Lead Free", Length=2mm, Mount="Surface Mount", Number of Pins=2, Packaging="Tape and Reel", Pricing 1="1=0.47, 10=0.323, 100=0.1941, 500=0.1455, 1000=0.1229 (USD)", Radiation Hardening=No, Stock 1=14125, Supplier 1=Digi-Key, Termination=SMD/SMT, Thickness=0.037inch, Voltage Rating (DC)=50V, Width=0.049inch
C9 C11 C12 C13: library part UMK212SD103KD-T, "CAP 10nF 50V RF", Capacitance=10nF, Case Code (Imperial)=0805, Case Code (Metric)=2012, Dielectric Material=Ceramic, Manufacturer="Taiyo Yuden", Max Operating Temperature=125°C, Min Operating Temperature=-55°C, Package Quantity=1, Supplier Part Number 1=587-1114-1-ND, Tolerance=10%, Voltage Rating=50V, Case/Package=0805, ComponentLink1Description=https://datasheet.ciiva.com/138/umk212sd103kd-t-ss-138661.pdf, ComponentLink1URL=https://datasheet.ciiva.com/138/umk212sd103kd-t-ss-138661.pdf, ComponentLink2Description=https://datasheet.ciiva.com/138/mlcc07-e-138662.pdf, ComponentLink2URL=https://datasheet.ciiva.com/138/mlcc07-e-138662.pdf, ComponentLink3Description=https://datasheet.ciiva.com/138/mlcc07-e-138663.pdf, ComponentLink3URL=https://datasheet.ciiva.com/138/mlcc07-e-138663.pdf, ComponentLink4Description=https://datasheet.ciiva.com/30140/303umk212sd103kd-t-30140925.pdf, ComponentLink4URL=https://datasheet.ciiva.com/30140/303umk212sd103kd-t-30140925.pdf, Depth=1.25mm, Halogen Free="Halogen Free", Height=0.85mm, Lead Free="Lead Free", Length=2mm, Manufacturer Part Number=UMK212SD103KD-T, Mount="Surface Mount", Number of Pins=2, Packaging="Tape and Reel", Pricing 1="1=0.47, 10=0.323, 100=0.1941, 500=0.1455, 1000=0.1229 (USD)", Radiation Hardening=No, Stock 1=14125, Supplier 1=Digi-Key, Termination=SMD/SMT, Thickness=0.037inch, Voltage Rating (DC)=50V, Width=0.049inch
D1: library part "LG L29K-G2J1-24-Z", "LED GREEN DIFFUSED 0603 SMD", Current - Test=2mA, Lens Color=White, Manufacturer="OSRAM Opto Semiconductors Inc.", Millicandela Rating=3.92mcd, Package / Case="0603 (1608 Metric)", Supplier Device Package=0603, Supplier Part Number 1=475-2709-1-ND, Voltage - Forward (Vf) (Typ)=1.7V, Category=Optoelectronics, Color=Green, ComponentLink1Description=http://www.osram-os.com/Graphics/XPic0/00167682_0.pdf, ComponentLink1URL=http://www.osram-os.com/Graphics/XPic0/00167682_0.pdf, Features=-, Height (Max)=0.65mm, Lens Style/Size="Rectangle with Flat Top, 1.30mm x 0.80mm", Lens Transparency=Diffused, Manufacturer Part Number="LG L29K-G2J1-24-Z", Mounting Type="Surface Mount", Packaging="Cut Tape (CT)", Part Status=Active, Pricing 1="1=0.47, 10=0.339, 25=0.2768, 100=0.2215, 250=0.18688, 500=0.15918, 1000=0.12458, 2500=0.1142 (USD)", RoHS="RoHS Compliant", Size / Dimension="1.70mm L x 0.80mm W", Stock 1=0, Supplier 1=Digi-Key, Viewing Angle=160°, Wavelength - Dominant=570nm, Wavelength - Peak=572nm
J1 J2 J3 J4 J5 J6 J7: "SMA Right Angle Jack, Edge Mount Screw On, Heavy Duty, Up to 18 GHz, -65 to 165 degC", PartNumber=32K243-40ML5, ComponentLink1Description="Manufacturer URL", ComponentLink1URL=http://www.rosenberger.de, ComponentLink2Description=Datasheet, ComponentLink2URL=http://rosenberger.de/ok/images/documents/db/32K243-40ML5.pdf, ComponentLink3Description="Package Specification", ComponentLink3URL=http://rosenberger.de/ok/images/documents/db/32K243-40ML5.pdf, ComponentLink4Description="Series Overview / Design Note", ComponentLink4URL=http://rosenberger.de/ok/images/documents/spez/32.pdf, ComponentLink5Description="Webshop / RFQ", ComponentLink5URL=http://www.rosenberger.com/en/contact/sales/, DatasheetVersion=c00, Design Note="Footprint in library is a generic example - only application specific footprint delivers High Performance", Mounting Technology="Surface Mount", PackageDescription="SMA Right Angle Jack, Edge Mount Screw On, 14.50 x 14.00 x 5.15 mm", PackageReference=32K243-40ML5, PackageVersion=c00
JP1 JP2 JP3 JP4 JP5 JP6 JP7 JP9 JP10 JP11 JP12 JP13 JP14 JP15: library part Jumper-01x03, "01X03 generic terminal connector"
JP8: library part 68000-204HLF, "B.II CONN HEADER 4POS .100 STR 15AU", Colour=Black, Current Rating=3A, Flammability Rating="UL94 V-0", Insulation Resistance=5GR, Manufacturer="Amphenol FCI", Max Operating Temperature=125°C, Max Voltage Rating (AC)=1.5kV, Min Operating Temperature=-65°C, Package Quantity=100, Supplier Part Number 1=609-3255-ND, ComponentLink1Description=https://datasheet.ciiva.com/728/68000-728901.pdf, ComponentLink1URL=https://datasheet.ciiva.com/728/68000-728901.pdf, ComponentLink2Description=https://datasheet.ciiva.com/22873/70302489-22873093.pdf, ComponentLink2URL=https://datasheet.ciiva.com/22873/70302489-22873093.pdf, ComponentLink3Description=https://datasheet.ciiva.com/10149/68000-10149835.pdf, ComponentLink3URL=https://datasheet.ciiva.com/10149/68000-10149835.pdf, ComponentLink4Description=https://datasheet.ciiva.com/5149/68000-274280-5149869.pdf, ComponentLink4URL=https://datasheet.ciiva.com/5149/68000-274280-5149869.pdf, ComponentLink5Description=https://datasheet.ciiva.com/46395/1914865-46395853.pdf, ComponentLink5URL=https://datasheet.ciiva.com/46395/1914865-46395853.pdf, Connector Type="Male Pin", Contact Gender=Male, Contact Material=Bronze, Contact Mating Length=0.23inch, Contact Plating=Nickel,Gold,GXT, Depth=2.41mm, Gender=Male, Housing Colour=Black, Housing Material=Thermoplastic, Length=10.16mm, Manufacturer Part Number=68000-204HLF, Mating Post Length=5.84mm, Mount="Through Hole", Number of Contacts=4, Number of Positions=4, Number of Rows=1, Orientation=Straight, Packaging=Bulk, Pitch=2.54mm, Pricing 1="1=0.31, 10=0.293, 100=0.2048, 500=0.1756, 1000=0.1463, 5000=0.1254, 10000=0.117 (USD)", Radiation Hardening=No, Stock 1=4921, Supplier 1=Digi-Key, Termination=Solder, Termination Post Length=2.41mm, Voltage Rating=1.5kV
POWER1: "PJ-002AH", Colour=Black, Current Rating=5A, Flammability Rating="UL94 V-0", Insulation Resistance=50MR, Manufacturer=CUI, Max Operating Temperature=85°C, Min Operating Temperature=-25°C, Package Quantity=500, Supplier Part Number 1=CP-002AH-ND, Voltage Rating=24V, ComponentLink1Description=http://www.cui.com/Product/Resource/FuturePDF/PJ-002AH.pdf, ComponentLink1URL=http://www.cui.com/Product/Resource/FuturePDF/PJ-002AH.pdf, ComponentLink2Description=http://www.cui.com/product/resource/digikeypdf/pj-002ah.pdf, ComponentLink2URL=http://www.cui.com/product/resource/digikeypdf/pj-002ah.pdf, ComponentLink3Description=http://www.mouser.com/ds/2/670/pj-002ah-516007.pdf, ComponentLink3URL=http://www.mouser.com/ds/2/670/pj-002ah-516007.pdf, Connector Type=Jack, Contact Gender=Male, Contact Material="Copper,Copper Alloy", Contact Plating=Nickel, Diameter=2.1mm, Gender=Male, Housing Colour=Black, Housing Material=Thermoplastic, Lead Free="Lead Free", Manufacturer Part Number=PJ-002AH, Mount="Through Hole", Number of Conductors=2, Orientation=Horizontal, Packaging=Bulk, Pricing 1="1=0.74, 10=0.696, 25=0.6264, 50=0.5568, 100=0.5336, 250=0.4872, 500=0.464, 1000=0.3828, 2500=0.348 (USD)", Shielding=Unshielded, Stock 1=95768, Supplier 1=Digi-Key, Termination="Through Hole"
R1 R2 R3 R4 R5 R6 R7 R8 R9 R10 R11 R12 R14 R15: library part "Res 100"
R13: library part RES
S1: library part 940-44-020-24-000000, Case/Package=PLCC, Manufacturer=Mill-Max, Max Operating Temperature=120°C, Min Operating Temperature=-40°C, Package Quantity=38, Supplier Part Number 1=ED90005-ND, Body Material=PPS, Category="IC and Component Sockets", ComponentLink1Description=https://datasheet.ciiva.com/3963/940-44-020-24-000000-3963718.pdf?src-supplier=Arrow+Electronics, ComponentLink1URL=https://datasheet.ciiva.com/3963/940-44-020-24-000000-3963718.pdf?src-supplier=Arrow+Electronics, ComponentLink2Description=https://datasheet.ciiva.com/16425/9404402024000000-16425193.pdf?src-supplier=Future+Electronics, ComponentLink2URL=https://datasheet.ciiva.com/16425/9404402024000000-16425193.pdf?src-supplier=Future+Electronics, Contact Material=Copper, Contact Plating=Tin, Contact Type="Type D", Depth=15.57mm, Housing Material=Polyphenylene, Insulation Material=Polyphenylene, Lead Free="Lead Free", Length=15.57mm, Manufacturer Part Number=940-44-020-24-000000, Mount="Through Hole", Number of Contacts=20, Number of Pins=20, Number of Positions=20, Number of Rows=4, Orientation=Straight, Packaging=Rail/Tube, Pitch=0.1inch, Pricing 1="1=1.60000, 10=1.44800, 25=1.35920, 50=1.30020, 100=1.24110, 250=1.12292, 500=1.03426, 1000=0.88650, 2500=0.82740 (USD)", RoHS=Yes, RoHS Compliant=Yes, Series=940, Stock 1=458, Supplier 1=Digi-Key, Termination=Solder, Width=15.57mm
S2: "L101011MS02Q", Contact Current Rating=2A, Current Rating=4A, Manufacturer="ITT C&K", Max Operating Temperature=65°C, Max Voltage Rating (AC)=250V, Max Voltage Rating (DC)=125V, Min Operating Temperature=-30°C, Package Quantity=1, Supplier Part Number 1=CKC5106-ND, Voltage Rating (DC)=28V, Actuator Length=5.08mm, Actuator Material=Nylon,Polyamide, ComponentLink1Description=https://datasheet.ciiva.com/17406/l-10jun14-17406600.pdf, ComponentLink1URL=https://datasheet.ciiva.com/17406/l-10jun14-17406600.pdf, ComponentLink2Description=https://datasheet.ciiva.com/18147/getdatasheetpartid-301248-18147196.pdf, ComponentLink2URL=https://datasheet.ciiva.com/18147/getdatasheetpartid-301248-18147196.pdf, ComponentLink3Description=https://datasheet.ciiva.com/2889/l-10jun14-2889869.pdf, ComponentLink3URL=https://datasheet.ciiva.com/2889/l-10jun14-2889869.pdf, Contact Material=Copper, Contact Plating=Silver, Depth=10.8mm, Electrical Life=10000Cycles, Housing Material=Nylon, Lead Free="Lead Free", Length=19.1mm, Manufacturer Part Number=L101011MS02Q, Max Current Rating=4A, Mount="Through Hole", Orientation=Straight, Packaging=Bulk, Pricing 1="1=1.65, 10=1.584, 25=1.5504, 50=1.3482, 100=1.3145, 250=1.2808, 500=1.0786, 1000=1.0112, 5000=0.9269 (USD)", Radiation Hardening=No, Stock 1=8267, Supplier 1=Digi-Key, Switch Function=On-Off, Switch Travel=3.81mm, Termination="PC Pins", Throw Configuration=SPST, Voltage Rating (AC)=125V
U1: library part LM1085-IS-5.0/NOP, "No Description Available", Manufacturer_Part_Number=LM1085IS-5.0/NOPB, Supplier Part Number 1=LM1085IS-5.0/NOPB-ND, Built_By=EMA_UL_Team, Copyright="Copyright (C) 2018 Accelerated Designs. All rights reserved", RefDes=RefDes, SourceLibrary=National_2011-09-26, Supplier 1=Digi-Key, Type=DEV, Vendor="Texas Instruments"

## Via types
v1: diameter 25, hole 10, Top layer to Bottom Layer, 399 vias
v2: diameter 25, hole 10, Top layer to Bottom Layer, tented both sides, 1 vias

## Nets (pads, with @x,y where several pads share a name; then routed paths per layer and width w, separated by ;. In a path a pad name is that pad's centre, name@x,y a point inside that pad or via, vN(x,y) a via of type N, cw(c..) or ccw(c..) an arc to the next point about the centre after c; other vN are vias at no path point)
12-5V_regulator: 0.2-2V.9 0.2-2V.12 0.2-2V.13 0.2-2V.14 0.2-3.3V.9 0.2-3.3V.12 0.2-3.3V.13 0.2-3.3V.14 0.2-5V.9 0.2-5V.12 0.2-5V.13 0.2-5V.14 0.5-2V.9 0.5-2V.12 0.5-2V.13 0.5-2V.14 0.9-5V.9 0.9-5V.12 0.9-5V.13 0.9-5V.14 2-5V.9 2-5V.12 2-5V.13 2-5V.14 7.9 7.12 7.13 7.14 C10.1 C11.1 C12.1 C13.1 R13.2 S1.62 U1.2 U1.4
12V: C1.1 C2.1 C9.1 S2.2 U1.3
+3V: JP15.2 S1.32
ADC_CLK: "FMC HPC1.F4" S1.27
  other v1: 5051,2843.49
ADC_CLK_SAMPLE: "FMC HPC1.F5" S1.26
  other v1: 5051,2793.49
ADC_DOUT1: "FMC HPC1.F20" S1.15
  other v1: 5051,2043.49
ADC_DOUT2: "FMC HPC1.F19" S1.16
  other v1: 5051,2093.49
ADC_DOUT3: "FMC HPC1.F17" S1.17
  other v1: 5051,2193.49
ADC_DOUT4: "FMC HPC1.F16" S1.18
  other v1: 5051,2243.49
ADC_DOUT5: "FMC HPC1.F14" S1.19
  other v1: 5051,2343.49
ADC_DOUT6: "FMC HPC1.F13" S1.20
  other v1: 5051,2393.49
ADC_DOUT7: "FMC HPC1.F11" S1.21
  other v1: 5051,2493.49
ADC_DOUT8: "FMC HPC1.F10" S1.22
  other v1: 5051,2543.49
ADC_DOUT9: "FMC HPC1.F8" S1.23
  other v1: 5051,2643.49
ADC_DOUT10: "FMC HPC1.F7" S1.24
  other v1: 5051,2693.49
ADC_VIN: JP1.1 S1.40
DAC_CLK_AZ_IN1: "FMC HPC1.D12" S1.70
  other v1: 5151,2443.49
DAC_CLK_DAC_IN1: "FMC HPC1.D14" S1.71
  other v1: 5151,2343.49
DAC_CLK_IN1: "FMC HPC1.E2" S1.76
  other v1: 5101,2943.49
DAC_DATAIN_IN1: "FMC HPC1.D9" S1.68
  other v1: 5151,2593.49
DAC_RST_IN1: "FMC HPC1.D11" S1.69
  other v1: 5151,2493.49
DAC_SHIFTOUT1: "FMC HPC1.E6" S1.80
  other v1: 5101,2743.49
DAC_SYNC_IN1: "FMC HPC1.D8" S1.67
  other v1: 5151,2643.49
DAC_TBUFFER_IN1: "FMC HPC1.E3" S1.79
  other v1: 5101,2893.49
DAC_TBUFFER_OUT1: JP7.1 S1.2
DAC_TDAC_IN1: "FMC HPC1.E7" S1.78
  other v1: 5101,2693.49
DAC_TDAC_OUT1: JP5.1 S1.77
DAC_VREF1: JP6.1 S1.1
GND: 0.2-2V.6 0.2-2V.7 0.2-2V.10 0.2-2V.11 0.2-3.3V.6 0.2-3.3V.7 0.2-3.3V.10 0.2-3.3V.11 0.2-5V.6 0.2-5V.7 0.2-5V.10 0.2-5V.11 0.5-2V.6 0.5-2V.7 0.5-2V.10 0.5-2V.11 0.9-5V.6 0.9-5V.7 0.9-5V.10 0.9-5V.11 2-5V.6 2-5V.7 2-5V.10 2-5V.11 7.6 7.7 7.10 7.11 "FMC HPC1.A1" "FMC HPC1.A4" "FMC HPC1.A5" "FMC HPC1.A8" "FMC HPC1.A9" "FMC HPC1.A12" "FMC HPC1.A13" "FMC HPC1.A16" "FMC HPC1.A17" "FMC HPC1.A20" "FMC HPC1.A21" "FMC HPC1.A24" "FMC HPC1.A25" "FMC HPC1.A28" "FMC HPC1.A29" "FMC HPC1.A32" "FMC HPC1.A33" "FMC HPC1.A36" "FMC HPC1.A37" "FMC HPC1.A40" "FMC HPC1.B2" "FMC HPC1.B3" "FMC HPC1.B6" "FMC HPC1.B7" "FMC HPC1.B10" "FMC HPC1.B11" "FMC HPC1.B14" "FMC HPC1.B15" "FMC HPC1.B18" "FMC HPC1.B19" "FMC HPC1.B22" "FMC HPC1.B23" "FMC HPC1.B26" "FMC HPC1.B27" "FMC HPC1.B30" "FMC HPC1.B31" "FMC HPC1.B34" "FMC HPC1.B35" "FMC HPC1.B38" "FMC HPC1.B39" "FMC HPC1.C1" "FMC HPC1.C4" "FMC HPC1.C5" "FMC HPC1.C8" "FMC HPC1.C9" "FMC HPC1.C12" "FMC HPC1.C13" "FMC HPC1.C16" "FMC HPC1.C17" "FMC HPC1.C20" "FMC HPC1.C21" "FMC HPC1.C24" "FMC HPC1.C25" "FMC HPC1.C28" "FMC HPC1.C29" "FMC HPC1.C32" "FMC HPC1.C33" "FMC HPC1.C36" "FMC HPC1.C38" "FMC HPC1.C40" "FMC HPC1.D2" "FMC HPC1.D3" "FMC HPC1.D6" "FMC HPC1.D7" "FMC HPC1.D10" "FMC HPC1.D13" "FMC HPC1.D16" "FMC HPC1.D19" "FMC HPC1.D22" "FMC HPC1.D25" "FMC HPC1.D28" "FMC HPC1.D37" "FMC HPC1.D39" "FMC HPC1.E1" "FMC HPC1.E4" "FMC HPC1.E5" "FMC HPC1.E8" "FMC HPC1.E11" "FMC HPC1.E14" "FMC HPC1.E17" "FMC HPC1.E20" "FMC HPC1.E23" "FMC HPC1.E26" "FMC HPC1.E29" "FMC HPC1.E32" "FMC HPC1.E35" "FMC HPC1.E38" "FMC HPC1.E40" "FMC HPC1.F2" "FMC HPC1.F3" "FMC HPC1.F6" "FMC HPC1.F9" "FMC HPC1.F12" "FMC HPC1.F15" "FMC HPC1.F18" "FMC HPC1.F21" "FMC HPC1.F24" "FMC HPC1.F27" "FMC HPC1.F30" "FMC HPC1.F33" "FMC HPC1.F36" "FMC HPC1.F39" "FMC HPC1.G1" "FMC HPC1.G4" "FMC HPC1.G5" "FMC HPC1.G8" "FMC HPC1.G11" "FMC HPC1.G14" "FMC HPC1.G17" "FMC HPC1.G20" "FMC HPC1.G23" "FMC HPC1.G26" "FMC HPC1.G29" "FMC HPC1.G32" "FMC HPC1.G35" "FMC HPC1.G38" "FMC HPC1.G40" "FMC HPC1.H3" "FMC HPC1.H6" "FMC HPC1.H9" "FMC HPC1.H12" "FMC HPC1.H15" "FMC HPC1.H18" "FMC HPC1.H21" "FMC HPC1.H24" "FMC HPC1.H27" "FMC HPC1.H30" "FMC HPC1.H33" "FMC HPC1.H36" "FMC HPC1.H39" "FMC HPC1.J1" "FMC HPC1.J4" "FMC HPC1.J5" "FMC HPC1.J8" "FMC HPC1.J11" "FMC HPC1.J14" "FMC HPC1.J17" "FMC HPC1.J20" "FMC HPC1.J23" "FMC HPC1.J26" "FMC HPC1.J29" "FMC HPC1.J32" "FMC HPC1.J35" "FMC HPC1.J38" "FMC HPC1.J40" "FMC HPC1.K3" "FMC HPC1.K6" "FMC HPC1.K9" "FMC HPC1.K12" "FMC HPC1.K15" "FMC HPC1.K18" "FMC HPC1.K21" "FMC HPC1.K24" "FMC HPC1.K27" "FMC HPC1.K30" "FMC HPC1.K33" "FMC HPC1.K36" "FMC HPC1.K39" C3.1 C4.1 C5.1 C6.1 C7.1 C8.1 C9.2 C10.2 C11.2 C12.2 C13.2 C14.1 D1.1 J1.MH J2.MH J3.MH J4.MH J5.MH J6.MH J7.MH JP1.3 JP2.3 JP3.3 JP4.3 JP5.3 JP6.3 JP7.3 JP8.3 JP9.3 JP10.3 JP11.3 JP12.3 JP13.2 JP14.3 JP15.3 POWER1.2 POWER1.3 R2.1 R4.1 R6.1 R8.1 R10.1 R12.1 R15.1 S1.28 S1.30 S1.58 S1.61 S1.66 U1.1 | length 6220.6
  Top layer w10: J3.MH@110,3260 110,3225.48 110,2889 JP1.3 379.51,2800 cw(c379.51,2730.06) 449.45,2730.06 cw(c369.39,2730.06) 369.39,2650 210,2650 ccw(c210,2550) 110,2550 110,2514.99 110,2178.5 JP4.3 390,2090 cw(c390,2020) 460,2020 cw(c380,2020) 380,1940 210,1940 ccw(c210,1840) 110,1840 110,1804.49 110,1468.01 JP5.3 390,1380 cw(c390,1310) 460,1310 cw(c380,1310) 380,1230 210,1230 ccw(c210,1130) 110,1130 110,1093.99 110,757.51 JP6.3 380,670 cw(c380,600) 450,600 cw(c370,600) 370,520 210,520 ccw(c210,420) 110,420 110,383.49 110,78.82 ccw(c111.81,78.82) 111.81,77.01 JP7.3 389.51,-10 cw(c389.51,-79.94) 459.45,-79.94 cw(c379.39,-79.94) 379.39,-160 211.81,-160 ccw(c211.81,-260) 111.81,-260 J7.MH@111.81,-297.01 ; J2.MH@110,4270 J2.MH@110,4310 ; JP3.3 JP3.3@380,3510 ; JP2.3 JP2.3@370,4020 ; 4961.86,2971.53 4963.37,2972.27 ccw(c4958.93,2981.24) 4965.36,2973.57 ; 4970.18,2978.18 4974.52,2982.52 cw(c5001,2956.04) v1(5001,2993.49)
  other v1: 4901,1043.49 4951,1043.49 5001,1043.49 5051,1043.49 5101,1043.49 5151,1043.49 5201,1043.49 5251,1043.49 5301,1043.49 4851,1093.49 4901,1093.49 4951,1093.49 5001,1093.49 5051,1093.49 5101,1093.49 5151,1093.49 5201,1093.49 5251,1093.49 5301,1093.49 4901,1143.49 4951,1143.49 5001,1143.49 5051,1143.49 5101,1143.49 5151,1143.49 5201,1143.49 5251,1143.49 5301,1143.49 4901,1193.49 4951,1193.49 5001,1193.49 5051,1193.49 5101,1193.49 5151,1193.49 5201,1193.49 5251,1193.49 5301,1193.49 4851,1243.49 4901,1243.49 4951,1243.49 5001,1243.49 5051,1243.49 5101,1243.49 5151,1243.49 5201,1243.49 5251,1243.49 5301,1243.49 4901,1293.49 4951,1293.49 5001,1293.49 5051,1293.49 5101,1293.49 5151,1293.49 5201,1293.49 5251,1293.49 5301,1293.49 4901,1343.49 4951,1343.49 5001,1343.49 5051,1343.49 5101,1343.49 5151,1343.49 5201,1343.49 5251,1343.49 5301,1343.49 4851,1393.49 4951,1393.49 5051,1393.49 5201,1393.49 5301,1393.49 4901,1443.49 5001,1443.49 5101,1443.49 5201,1443.49 5301,1443.49 5251,1493.49 4851,1543.49 4951,1543.49 5051,1543.49 5251,1543.49 4901,1593.49 5001,1593.49 5101,1593.49 5201,1593.49 5301,1593.49 5151,1643.49 5201,1643.49 5301,1643.49 4851,1693.49 4951,1693.49 5051,1693.49 5251,1693.49 4901,1743.49 5001,1743.49 5101,1743.49 5251,1743.49 5151,1793.49 5201,1793.49 5301,1793.49 4851,1843.49 4951,1843.49 5051,1843.49 5201,1843.49 5301,1843.49 4901,1893.49 5001,1893.49 5101,1893.49 5251,1893.49 5151,1943.49 5251,1943.49 4851,1993.49 4951,1993.49 5051,1993.49 5201,1993.49 5301,1993.49 4901,2043.49 5001,2043.49 5101,2043.49 5201,2043.49 5301,2043.49 5151,2093.49 5251,2093.49 4851,2143.49 4951,2143.49 5051,2143.49 5251,2143.49 4901,2193.49 5001,2193.49 5101,2193.49 5201,2193.49 5301,2193.49 5151,2243.49 5201,2243.49 5301,2243.49 4851,2293.49 4951,2293.49 5051,2293.49 5251,2293.49 4901,2343.49 5001,2343.49 5101,2343.49 5251,2343.49 5151,2393.49 5201,2393.49 5301,2393.49 4851,2443.49 4951,2443.49 5051,2443.49 5201,2443.49 5301,2443.49 4901,2493.49 5001,2493.49 5101,2493.49 5251,2493.49 5151,2543.49 5251,2543.49 4851,2593.49 4951,2593.49 5051,2593.49 5201,2593.49 5301,2593.49 4901,2643.49 5001,2643.49 5101,2643.49 5201,2643.49 5301,2643.49 5151,2693.49 5251,2693.49 4851,2743.49 4951,2743.49 5051,2743.49 5151,2743.49 5251,2743.49 4901,2793.49 5001,2793.49 5101,2793.49 5201,2793.49 5301,2793.49 4901,2843.49 5001,2843.49 5101,2843.49 5201,2843.49 5301,2843.49 4851,2893.49 4951,2893.49 5051,2893.49 5151,2893.49 5251,2893.49 5051,2943.49 5151,2943.49 5251,2943.49 4901,2993.49 5101,2993.49 5201,2993.49 5301,2993.49
Net0.2-2V_3: 0.2-2V.3 0.2-2V.4 *4.3 C6.2 JP12.1
Net0.2-2V_5: 0.2-2V.5 *4.1 *4.2 R7.2
Net0.2-3.3V_3: 0.2-3.3V.3 *6.3 C8.2 JP14.1
Net0.2-3.3V_5: 0.2-3.3V.5 *6.1 *6.2 R11.2
Net0.2-5V_3: 0.2-5V.3 0.2-5V.4 *5.3 C7.2 JP13.1
Net0.2-5V_5: 0.2-5V.5 *5.1 *5.2 R9.2
Net0.5-2V_3: 0.5-2V.3 0.5-2V.4 *1.3 C3.2 JP9.1
Net0.5-2V_5: 0.5-2V.5 *1.1 *1.2 R1.2
Net0.9-5V_3: 0.9-5V.3 0.9-5V.4 *3.3 C5.2 JP11.1
Net0.9-5V_5: 0.9-5V.5 *3.1 *3.2 R5.2
Net2-5V_3: 2-5V.3 2-5V.4 *2.3 C4.2 JP10.1
Net2-5V_5: 2-5V.5 *2.1 *2.2 R3.2
Net7_3: 7.3 *7.3 C14.2 JP15.1
Net7_5: 7.5 *7.1 *7.2 R14.2
NetD1_2: D1.2 R13.1
NetJ1_1: J1.1 JP1.2 | length 262.6
  Top layer w20: J1.1 98.74,2701.44 358.56,2701.44 JP1.2
NetJ2_1: J2.1 JP2.2 | length 3.5
  Top layer w20: JP2.2@357.56,4122.44 JP2.2
NetJ3_1: J3.1 JP3.2 | length 0.8
  Top layer w20: J3.1 J3.1@98.74,3411.94
NetJ4_1: J4.1 JP4.2 | length 262.4
  Top layer w20: J4.1 98.74,1990.94 359.06,1990.94 JP4.2
NetJ5_1: J5.1 JP5.2 | length 262.2
  Top layer w10: J5.1 J5.1@98.69,1280.5 ; JP5.2@359.5,1280.5 JP5.2
  Top layer w20: J5.1@98.69,1280.5 JP5.2@359.5,1280.5
NetJ6_1: J6.1 JP6.2 | length 262
  Top layer w20: J6.1 98.44,570.25 359.75,570.25 JP6.2
NetJ7_1: J7.1 JP7.2 | length 260
  Top layer w20: J7.1 JP7.2
NetR1_1: R1.1 R2.2
NetR3_1: R3.1 R4.2
NetR5_1: R5.1 R6.2
NetR7_1: R7.1 R8.2
NetR9_1: R9.1 R10.2
NetR11_1: R11.1 R12.2
NetR14_1: R14.1 R15.2
POWER: JP8.2 JP8.4 POWER1.1 S2.1
TIA_CIN0: "FMC HPC1.C11" S1.42
  other v1: 5201,2493.49
TIA_CIN1: "FMC HPC1.C18" S1.47
  other v1: 5201,2143.49
TIA_CIN2: "FMC HPC1.C10" S1.41
  other v1: 5201,2543.49
TIA_CIN3: "FMC HPC1.C15" S1.46
  other v1: 5201,2293.49
TIA_CIN4: "FMC HPC1.C19" S1.50
  other v1: 5201,2093.49
TIA_CIN5: "FMC HPC1.C14" S1.44
  other v1: 5201,2343.49
TIA_CIN6: "FMC HPC1.C22" S1.64
  other v1: 5201,1943.49
TIA_VIN: JP2.1 S1.43
TIA_VIP: JP3.1 S1.45
TIA_VOUT: JP4.1 S1.63
VOUT_0.2-2V: JP12.2 S1.29 S1.35 S1.36 S1.37 S1.39 S1.48 S1.81 S1.82
VOUT_0.2V-3.3V: JP14.2 S1.83 S1.84
VOUT_0.2V-5V: S1.49 S1.56 S1.57 S1.60
VOUT_0.5V-2V: JP9.2 S1.38
VOUT_0.9V-5V: JP11.2 S1.59
VOUT_2V-5V: JP10.2 S1.65